# Altium PCB Mikrolysreklamen15.PcbDoc
Units mm, origin at the board's own origin, x right, y up, seen from the top; angles counter-clockwise.
Board outline 173.33 x 36.67 mm, 4 copper layers (Top Layer, Internal Plane 1, Internal Plane 2, Bottom Layer), stack 0.971 mm thick; 90 components, 167 nets, 558 pads, 0 vias.
Unrouted connection lines stored in the file: 314.
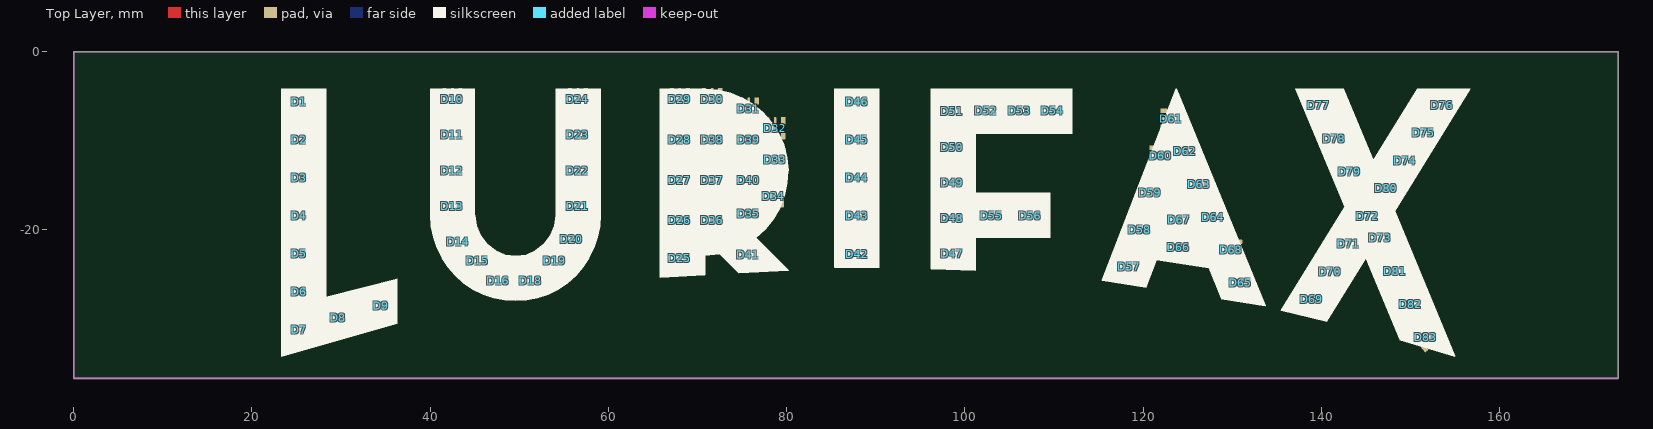
[diagram p0: Top Layer view]
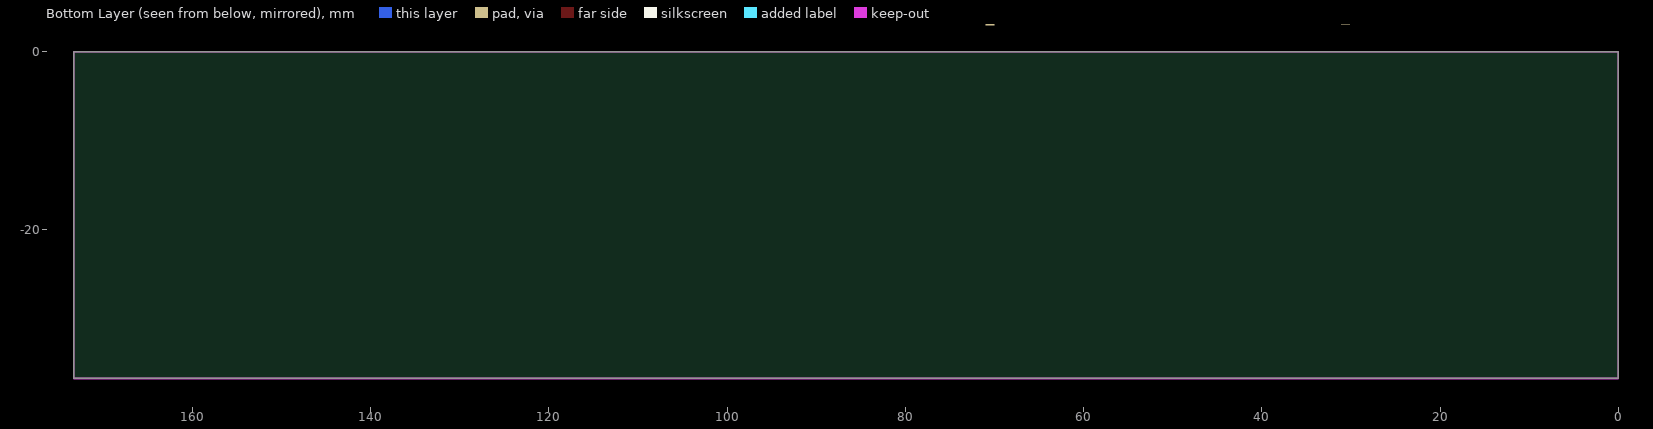
[diagram p1: Bottom Layer view, seen from below]
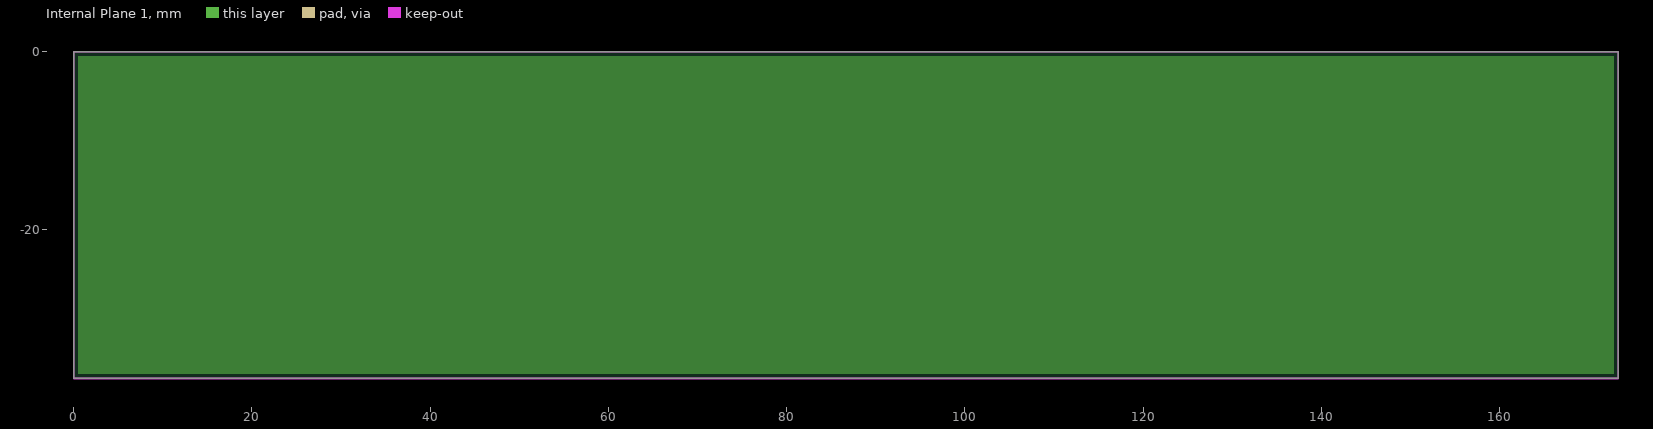
[diagram p2: Internal Plane 1, clearances drawn from the general rule]
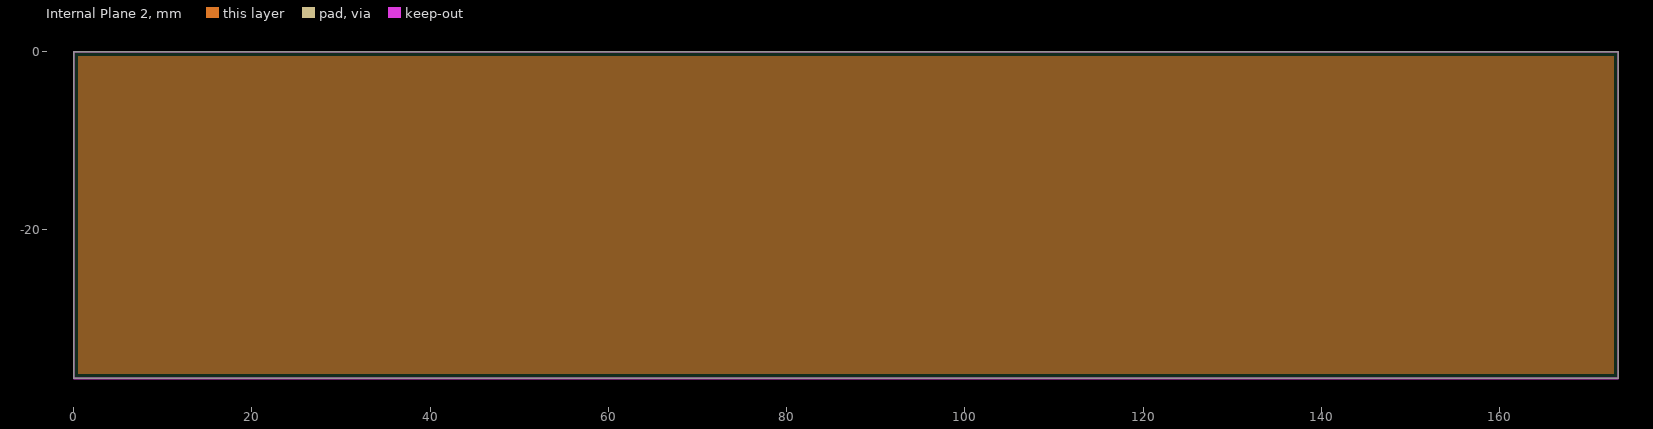
[diagram p3: Internal Plane 2, clearances drawn from the general rule]

## Layer stack, top to bottom
Top Solder: solder mask 0.0102, Solder Resist, Dk 3.5
Top Layer: signal copper 0.0356
Dielectric 3: dielectric 0.254, Dk 4.2
Internal Plane 1: plane copper 0.036
Dielectric 1: dielectric 0.32, FR-4, Dk 4.8
Internal Plane 2: plane copper 0.036
Dielectric 2: dielectric 0.254, Dk 4.2
Bottom Layer: signal copper 0.0356
Bottom Solder: solder mask 0.0102, Solder Resist, Dk 3.5

## Board outline
-0.001,-36.664 -0.001,0.003 173.332,0.003 173.332,-36.664

## Design rules (kind name [scope] priority, off if disabled: settings)
Clearance [All] p1: gap=0.16 ignorepadtopadclearanceinfootprint=FALSE except(0: Arc-Text Arc-Hole Track-Text Track-Hole SMDPad-Text SMDPad-Hole THPad-Text THPad-Hole Via-Text Via-Hole Fill-Text Fill-Hole Poly-Text Poly-Hole Region-Text Region-Hole Text-Text Text-Hole)
DiffPairsRouting [All] p1: maxlimit=0.254 minlimit=0.254 mostfreqgap=0.254 substack1={9E7FAFDF-2B63-4549-80CD-55CEDA884390} toplayer_{9e7fafdf-2b63-4549-80cd-55ceda884390}_minwidth=0.381 toplayer_{9e7fafdf-2b63-4549-80cd-55ceda884390}_maxwidth=0.381 toplayer_{9e7fafdf-2b63-4549-80cd-55ceda884390}_prefwidth=0.381 bottomlayer_{9e7fafdf-2b63-4549-80cd-55ceda884390}_minwidth=0.381 bottomlayer_{9e7fafdf-2b63-4549-80cd-55ceda884390}_maxwidth=0.381 bottomlayer_{9e7fafdf-2b63-4549-80cd-55ceda884390}_prefwidth=0.381 toplayer_minwidth=0.381 toplayer_maxwidth=0.381 toplayer_prefwidth=0.381 bottomlayer_minwidth=0.381 bottomlayer_maxwidth=0.381 bottomlayer_prefwidth=0.381 maxuncoupledlength=12.7
Height [All] p1: minheight=0 maxheight=200 prefheight=12.7
HoleSize [All] p1: absolutevalues=TRUE maxlimit=6.35 minlimit=0.3 maxpercent=80.000 minpercent=20.000
MinimumSolderMaskSliver [All] p1: minsoldermaskwidth=0.1
PlaneClearance [All] p1: clearance=1
PlaneConnect [All] p1: planeconnectstyle=Relief reliefexpansion=0.508 reliefentries=4 reliefconductorwidth=1 reliefairgap=0.254
PolygonConnect [All] p1: connectstyle=Direct reliefconductorwidth=0.254 reliefentries=4 polygonreliefangle="90 Angle" airgapwidth=0.254
RoutingVias [All] p1: holewidth=0.3 width=0.6 viastyle="Through Hole" minholewidth=0.3 minwidth=0.6 maxholewidth=6.35 maxwidth=10
SilkToSolderMaskClearance [IsPad] p1: minsilkscreentomaskgap=0.178 clearancetoexposedcopper=TRUE
SolderMaskExpansion [All] p1: expansion=0.102 istentingtop=FALSE
Width [All] p1: maxlimit=1 minlimit=0.16 preferedwidth=0.2 substack1={9E7FAFDF-2B63-4549-80CD-55CEDA884390}
23 further rules are at their usual default settings.

## Components (designator, comment, footprint, x,y, rotation, side; value= is the part's Value field where it differs from the comment)
C1 "100nF(0603)" CAPC0603(1608)55_N 98.9,6.8 r270 bottom
C2 "100nF(0603)" CAPC0603(1608)55_N 84.2,4.4 r270 bottom
C3 "100nF(0603)" CAPC0603(1608)55_N 70.5,4.2 r270 bottom
C4 "100nF(0603)" CAPC0603(1608)55_N 30.6,4.3 r270 bottom
C5 "100nF(0603)" CAPC0603(1608)55_N 20.5,5.5 r270 bottom
C6 "100nF(0603)" CAPC0603(1608)55_N 4.3,5.7 r270 bottom
D1 "APA102 2020" PCBComponent_1 25.333,-5.6 r90 top
D2 "APA102 2020" PCBComponent_1 25.333,-9.867 r90 top
D3 "APA102 2020" PCBComponent_1 25.333,-14.133 r90 top
D4 "APA102 2020" PCBComponent_1 25.333,-18.4 r90 top
D5 "APA102 2020" PCBComponent_1 25.333,-22.667 r90 top
D6 "APA102 2020" PCBComponent_1 25.333,-26.933 r90 top
D7 "APA102 2020" PCBComponent_1 25.333,-31.2 r90 top
D8 "APA102 2020" PCBComponent_1 29.667,-29.85 r180 top
D9 "APA102 2020" PCBComponent_1 34.5,-28.525 r180 top
D10 "APA102 2020" PCBComponent_1 42.5,-5.333 r90 top
D11 "APA102 2020" PCBComponent_1 42.5,-9.333 r90 top
D12 "APA102 2020" PCBComponent_1 42.5,-13.333 r90 top
D13 "APA102 2020" PCBComponent_1 42.5,-17.333 r90 top
D14 "APA102 2020" PCBComponent_1 43.167,-21.333 r90 top
D15 "APA102 2020" PCBComponent_1 45.333,-23.467 r180 top
D16 "APA102 2020" PCBComponent_1 47.625,-25.675 r180 top
D18 "APA102 2020" PCBComponent_1 51.292,-25.675 r180 top
D19 "APA102 2020" PCBComponent_1 54,-23.475 r270 top
D20 "APA102 2020" PCBComponent_1 55.917,-21.067 r270 top
D21 "APA102 2020" PCBComponent_1 56.583,-17.333 r270 top
D22 "APA102 2020" PCBComponent_1 56.583,-13.333 r270 top
D23 "APA102 2020" PCBComponent_1 56.583,-9.333 r270 top
D24 "APA102 2020" PCBComponent_1 56.583,-5.333 r270 top
D25 "APA102 2020" PCBComponent_1 68,-23.2 r270 top
D26 "APA102 2020" PCBComponent_1 68,-18.933 r270 top
D27 "APA102 2020" PCBComponent_1 68,-14.4 r270 top
D28 "APA102 2020" PCBComponent_1 68,-9.867 r270 top
D29 "APA102 2020" PCBComponent_1 68,-5.333 r90 top
D30 "APA102 2020" PCBComponent_1 71.667,-5.333 r270 top
D31 "APA102 2020" PCBComponent_1 75.75,-6.375 r270 top
D32 "APA102 2020" PCBComponent_1 78.725,-8.6 r270 top
D33 "APA102 2020" PCBComponent_1 78.7,-12.125 r270 top
D34 "APA102 2020" PCBComponent_1 78.575,-16.225 r270 top
D35 "APA102 2020" PCBComponent_1 75.75,-18.175 r270 top
D36 "APA102 2020" PCBComponent_1 71.667,-18.933 r270 top
D37 "APA102 2020" PCBComponent_1 71.667,-14.4 r270 top
D38 "APA102 2020" PCBComponent_1 71.667,-9.867 r270 top
D39 "APA102 2020" PCBComponent_1 75.75,-9.867 r270 top
D40 "APA102 2020" PCBComponent_1 75.75,-14.4 r270 top
D41 "APA102 2020" PCBComponent_1 75.675,-22.8 r270 top
D42 "APA102 2020" PCBComponent_1 87.9,-22.7 r270 top
D43 "APA102 2020" PCBComponent_1 87.9,-18.433 r270 top
D44 "APA102 2020" PCBComponent_1 87.9,-14.167 r270 top
D45 "APA102 2020" PCBComponent_1 87.9,-9.9 r270 top
D46 "APA102 2020" PCBComponent_1 87.9,-5.633 r270 top
D47 "APA102 2020" PCBComponent_1 98.6,-22.675 r270 top
D48 "APA102 2020" PCBComponent_1 98.6,-18.681 r270 top
D49 "APA102 2020" PCBComponent_1 98.6,-14.688 r270 top
D50 "APA102 2020" PCBComponent_1 98.6,-10.694 r270 top
D51 "APA102 2020" PCBComponent_1 98.6,-6.7 r270 top
D52 "APA102 2020" PCBComponent_1 102.425,-6.6 r180 top
D53 "APA102 2020" PCBComponent_1 106.15,-6.6 r180 top
D54 "APA102 2020" PCBComponent_1 109.875,-6.6 r180 top
D55 "APA102 2020" PCBComponent_1 103.012,-18.381 r180 top
D56 "APA102 2020" PCBComponent_1 107.325,-18.381 r0 top
D57 "APA102 2020" PCBComponent_1 118.433,-24.108 r0 top
D58 "APA102 2020" PCBComponent_1 119.621,-19.956 r0 top
D59 "APA102 2020" PCBComponent_1 120.808,-15.804 r0 top
D60 "APA102 2020" PCBComponent_1 121.996,-11.652 r0 top
D61 "APA102 2020" PCBComponent_1 123.183,-7.5 r0 top
D62 "APA102 2020" PCBComponent_1 124.742,-11.185 r0 top
D63 "APA102 2020" PCBComponent_1 126.3,-14.87 r0 top
D64 "APA102 2020" PCBComponent_1 127.858,-18.555 r0 top
D65 "APA102 2020" PCBComponent_1 130.975,-25.925 r0 top
D66 "APA102 2020" PCBComponent_1 124.025,-21.925 r0 top
D67 "APA102 2020" PCBComponent_1 124.075,-18.875 r0 top
D68 "APA102 2020" PCBComponent_1 129.9,-22.24 r0 top
D69 "APA102 2020" PCBComponent_1 138.925,-27.775 r228 top
D70 "APA102 2020" PCBComponent_1 141.023,-24.664 r228 top
D71 "APA102 2020" PCBComponent_1 143.11,-21.556 r129 top
D72 "APA102 2020" PCBComponent_1 145.219,-18.441 r228 top
D73 "APA102 2020" PCBComponent_1 146.615,-20.896 r228 top
D74 "APA102 2020" PCBComponent_1 149.415,-12.219 r228 top
D75 "APA102 2020" PCBComponent_1 151.513,-9.107 r228 top
D76 "APA102 2020" PCBComponent_1 153.6,-6 r129 top
D77 "APA102 2020" PCBComponent_1 139.742,-6.033 r129 top
D78 "APA102 2020" PCBComponent_1 141.457,-9.75 r129 top
D79 "APA102 2020" PCBComponent_1 143.173,-13.467 r129 top
D80 "APA102 2020" PCBComponent_1 147.306,-15.334 r129 top
D81 "APA102 2020" PCBComponent_1 148.319,-24.617 r129 top
D82 "APA102 2020" PCBComponent_1 150.035,-28.333 r129 top
D83 "APA102 2020" PCBComponent_1 151.75,-32.05 r129 top
J1 "Header SMD 127 2x5" SMDHDRV10P127_2X5_615X330X560B 52,15 r180 bottom
U1 "AVR ATXMEGA64A4U-AU" TQFP80P1200X1200X120-44N 68.1,29.1 r180 bottom

## Footprints (in the part's own frame and the unit in brackets; to place one, negate y for a bottom-side part, rotate by r counter-clockwise, add the part's x,y. Pads: shape width x height; smd on the part's side, far side on the other; paste and mask are expansions set on the pad)
CAPC0603(1608)55_N [mm] "Chip Capacitor, Body 1.6x0.8mm, Height 0.55mm, IPC Medium Density"
  rect 0.9x1 smd: 1(-0.8,0) 2(0.8,0)
  silkscreen extent -0.05,-0.4 0.05,0.4, body extent -0.87,-0.48 0.88,0.47, height 0.55
PCBComponent_1 [mm]
  rect 0.8x0.5 smd: 1(-0.85,0.9)
  rrect50% 0.8x0.3 smd: 2(-0.85,0) 5(0.85,0)
  rrect50% 0.8x0.5 smd: 3(-0.85,-0.9) 4(0.85,-0.9) 6(0.85,0.9)
  body extent -1,-1 1,1, height 0.9
SMDHDRV10P127_2X5_615X330X560B [mm] "SMD 2X5 Vertical Header"
  rect 2.4x0.76 smd: 1(-1.95,2.54)
  rrect50% 2.4x0.76 smd: 2(1.95,2.54) 3(-1.95,1.27) 4(1.95,1.27) 5(-1.95,0) 6(1.95,0) 7(-1.95,-1.27) 8(1.95,-1.27) 9(-1.95,-2.54) 10(1.95,-2.54)
  silkscreen extent -4.54,-4.21 1.95,4.29
TQFP80P1200X1200X120-44N [mm] "TQFP, 44-Leads, Body 10,00x10,00mm, Pitch 0,80mm, IPC Medium Density"
  oval 1.75x0.55 smd: 1(-5.875,4) 2(-5.875,3.2) 3(-5.875,2.4) 4(-5.875,1.6) 5(-5.875,0.8) 6(-5.875,0) 7(-5.875,-0.8) 8(-5.875,-1.6) 9(-5.875,-2.4) 10(-5.875,-3.2) 11(-5.875,-4) 23(5.875,-4) 24(5.875,-3.2) 25(5.875,-2.4) 26(5.875,-1.6) 27(5.875,-0.8) 28(5.875,0) 29(5.875,0.8) 30(5.875,1.6) 31(5.875,2.4) 32(5.875,3.2) 33(5.875,4)
  oval 0.55x1.75 smd: 12(-4,-5.875) 13(-3.2,-5.875) 14(-2.4,-5.875) 15(-1.6,-5.875) 16(-0.8,-5.875) 17(0,-5.875) 18(0.8,-5.875) 19(1.6,-5.875) 20(2.4,-5.875) 21(3.2,-5.875) 22(4,-5.875) 34(4,5.875) 35(3.2,5.875) 36(2.4,5.875) 37(1.6,5.875) 38(0.8,5.875) 39(0,5.875) 40(-0.8,5.875) 41(-1.6,5.875) 42(-2.4,5.875) 43(-3.2,5.875) 44(-4,5.875)
  silkscreen extent -6,-4.6 4.6,4.95, body extent -6.03,-5.97 5.97,6.03, height 1.1

## Part data
C1 C2 C3 C4 C5 C6: library part 3028, "100nF 0603 5% X7R 50V", id=3028, leverandor=Farnell, leverandor_varenr=1759122, navn=100nF(0603), nokkelord="Kondensator, Capacitor, CAP", pakke_opprettet="18.02.2015 14:18:13", pakke_opprettet_av=815, pakketype=93, pris=1, produsent=Multikomp, symbol_opprettet="14.11.2014 20:19:34", symbol_opprettet_av=815
D1 D2 D3 D4 D5 D6 D7 D8 D9 D10 D11 D12 D13 D14 D15 D16 D18 D19 D20 D21 D22 D23 D24 D25 D26 D27 D28 D29 D30 D31 D32 D33 D34 D35 D36 D37 D38 D39 D40 D41 D42 D43 D44 D45 D46 D47 D48 D49 D50 D51 D52 D53 D54 D55 D56 D57 D58 D59 D60 D61 D62 D63 D64 D65 D66 D67 D68 D69 D70 D71 D72 D73 D74 D75 D76 D77 D78 D79 D80 D81 D82 D83: library part APA102_2020, AdaFruit=3341, DigiKey=1528-2392-ND
J1: library part 2449, "1,27mm Pitch SMD Header", id=2449, navn="Header SMD 127 2x5", nokkelord=JTAG, pakke_opprettet="15.11.2014 18:30:38", pakke_opprettet_av=815, pakketype=101, pris=20, symbol_opprettet="15.11.2014 18:33:29", symbol_opprettet_av=815
U1: library part 2103, "Mikrokontroller", antall=75, dybde=0, hylle=0, id=2103, kolonne=2, lager_type=Fremlager, navn="AVR ATXMEGA64A4U-AU", pakke_opprettet="22.08.2014 14:00:28", pakke_opprettet_av=774, pakketype=45, pris=0, produsent=Atmel, rad=4, rom=OV, symbol_opprettet="22.08.2014 14:00:55", symbol_opprettet_av=774

## Nets (pads, with @x,y where several pads share a name; then routed paths per layer and width w, separated by ;. In a path a pad name is that pad's centre, name@x,y a point inside that pad or via, vN(x,y) a via of type N, cw(c..) or ccw(c..) an arc to the next point about the centre after c; other vN are vias at no path point)
GND: D2.6 D3.6 D4.6 D5.6 D6.6 D8.6 D9.6 D10.6 D12.6 D13.6 D14.6 D15.6 D16.6 D18.6 D19.6 D20.6 D22.6 D23.6 D24.6 D25.6 D26.6 D27.6 D28.6 D29.6 D30.6 D32.6 D33.6 D34.6 D35.6 D36.6 D37.6 D38.6 D39.6 D40.6 D42.6 D43.6 D44.6 D45.6 D46.6 D47.6 D48.6 D49.6 D50.6 D52.6 D53.6 D54.6 D55.6 D56.6 D57.6 D58.6 D59.6 D60.6 D62.6 D63.6 D64.6 D65.6 D66.6 D67.6 D68.6 D69.6 D70.6 D72.6 D73.6 D74.6 D75.6 D76.6 D77.6 D78.6 D79.6 D80.6 D82.6 D83.6
NetD1_2: D1.2 D2.5
NetD1_3: D1.3 D2.4
NetD1_4: D1.4 U1.25
NetD1_5: D1.5 U1.27
NetD2_2: D2.2 D3.5
NetD2_3: D2.3 D3.4
NetD3_2: D3.2 D4.5
NetD3_3: D3.3 D4.4
NetD4_2: D4.2 D5.5
NetD4_3: D4.3 D5.4
NetD5_2: D5.2 D6.5
NetD5_3: D5.3 D6.4
NetD6_2: D6.2 D7.5
NetD6_3: D6.3 D7.4
NetD7_2: D7.2 D8.5
NetD7_3: D7.3 D8.4
NetD8_2: D8.2 D9.5
NetD8_3: D8.3 D9.4
NetD9_2: D9.2 D10.5
NetD9_3: D9.3 D10.4
NetD10_2: D10.2 D11.5
NetD10_3: D10.3 D11.4
NetD11_2: D11.2 D12.5
NetD11_3: D11.3 D12.4
NetD12_2: D12.2 D13.5
NetD12_3: D12.3 D13.4
NetD13_2: D13.2 D14.5
NetD13_3: D13.3 D14.4
NetD14_2: D14.2 D15.5
NetD14_3: D14.3 D15.4
NetD15_2: D15.2 D16.5
NetD15_3: D15.3 D16.4
NetD16_2: D16.2 D18.5
NetD16_3: D16.3 D18.4
NetD18_2: D18.2 D19.5
NetD18_3: D18.3 D19.4
NetD19_2: D19.2 D20.5
NetD19_3: D19.3 D20.4
NetD20_2: D20.2 D21.5
NetD20_3: D20.3 D21.4
NetD21_2: D21.2 D22.5
NetD21_3: D21.3 D22.4
NetD22_2: D22.2 D23.5
NetD22_3: D22.3 D23.4
NetD23_2: D23.2 D24.5
NetD23_3: D23.3 D24.4
NetD24_2: D24.2 D25.5
NetD24_3: D24.3 D25.4
NetD25_2: D25.2 D26.5
NetD25_3: D25.3 D26.4
NetD26_2: D26.2 D27.5
NetD26_3: D26.3 D27.4
NetD27_1: D27.1 D37.1 D47.1 D57.1 D67.1 D77.1
NetD27_2: D27.2 D28.5
NetD27_3: D27.3 D28.4
NetD28_2: D28.2 D29.5
NetD28_3: D28.3 D29.4
NetD29_2: D29.2 D30.5
NetD29_3: D29.3 D30.4
NetD30_2: D30.2 D31.5
NetD30_3: D30.3 D31.4
NetD31_2: D31.2 D32.5
NetD31_3: D31.3 D32.4
NetD32_2: D32.2 D33.5
NetD32_3: D32.3 D33.4
NetD33_2: D33.2 D34.5
NetD33_3: D33.3 D34.4
NetD34_2: D34.2 D35.5
NetD34_3: D34.3 D35.4
NetD35_2: D35.2 D36.5
NetD35_3: D35.3 D36.4
NetD36_2: D36.2 D37.5
NetD36_3: D36.3 D37.4
NetD37_2: D37.2 D38.5
NetD37_3: D37.3 D38.4
NetD38_2: D38.2 D39.5
NetD38_3: D38.3 D39.4
NetD39_2: D39.2 D40.5
NetD39_3: D39.3 D40.4
NetD40_2: D40.2 D41.5
NetD40_3: D40.3 D41.4
NetD41_2: D41.2 D42.5
NetD41_3: D41.3 D42.4
NetD42_2: D42.2 D43.5
NetD42_3: D42.3 D43.4
NetD43_2: D43.2 D44.5
NetD43_3: D43.3 D44.4
NetD44_2: D44.2 D45.5
NetD44_3: D44.3 D45.4
NetD45_2: D45.2 D46.5
NetD45_3: D45.3 D46.4
NetD46_2: D46.2 D47.5
NetD46_3: D46.3 D47.4
NetD47_2: D47.2 D48.5
NetD47_3: D47.3 D48.4
NetD48_2: D48.2 D49.5
NetD48_3: D48.3 D49.4
NetD49_2: D49.2 D50.5
NetD49_3: D49.3 D50.4
NetD50_2: D50.2 D51.5
NetD50_3: D50.3 D51.4
NetD51_2: D51.2 D52.5
NetD51_3: D51.3 D52.4
NetD52_2: D52.2 D53.5
NetD52_3: D52.3 D53.4
NetD53_2: D53.2 D54.5
NetD53_3: D53.3 D54.4
NetD54_2: D54.2 D55.5
NetD54_3: D54.3 D55.4
NetD55_2: D55.2 D56.5
NetD55_3: D55.3 D56.4
NetD56_2: D56.2 D57.5
NetD56_3: D56.3 D57.4
NetD57_2: D57.2 D58.5
NetD57_3: D57.3 D58.4
NetD58_2: D58.2 D59.5
NetD58_3: D58.3 D59.4
NetD59_2: D59.2 D60.5
NetD59_3: D59.3 D60.4
NetD60_2: D60.2 D61.5
NetD60_3: D60.3 D61.4
NetD61_2: D61.2 D62.5
NetD61_3: D61.3 D62.4
NetD62_2: D62.2 D63.5
NetD62_3: D62.3 D63.4
NetD63_2: D63.2 D64.5
NetD63_3: D63.3 D64.4
NetD64_2: D64.2 D65.5
NetD64_3: D64.3 D65.4
NetD65_2: D65.2 D66.5
NetD65_3: D65.3 D66.4
NetD66_2: D66.2 D67.5
NetD66_3: D66.3 D67.4
NetD67_2: D67.2 D68.5
NetD67_3: D67.3 D68.4
NetD68_2: D68.2 D69.5
NetD68_3: D68.3 D69.4
NetD69_2: D69.2 D70.5
NetD69_3: D69.3 D70.4
NetD70_2: D70.2 D71.5
NetD70_3: D70.3 D71.4
NetD71_2: D71.2 D72.5
NetD71_3: D71.3 D72.4
NetD72_2: D72.2 D73.5
NetD72_3: D72.3 D73.4
NetD73_2: D73.2 D74.5
NetD73_3: D73.3 D74.4
NetD74_2: D74.2 D75.5
NetD74_3: D74.3 D75.4
NetD75_2: D75.2 D76.5
NetD75_3: D75.3 D76.4
NetD76_2: D76.2 D77.5
NetD76_3: D76.3 D77.4
NetD77_2: D77.2 D78.5
NetD77_3: D77.3 D78.4
NetD78_2: D78.2 D79.5
NetD78_3: D78.3 D79.4
NetD79_2: D79.2 D80.5
NetD79_3: D79.3 D80.4
NetD80_2: D80.2 D81.5
NetD80_3: D80.3 D81.4
NetD81_2: D81.2 D82.5
NetD81_3: D81.3 D82.4
NetD82_2: D82.2 D83.5
NetD82_3: D82.3 D83.4
VCC_P5V0: D1.1 D2.1 D3.1 D4.1 D5.1 D6.1 D7.1 D8.1 D9.1 D10.1 D11.1 D12.1 D13.1 D14.1 D15.1 D16.1 D18.1 D19.1 D20.1 D21.1 D22.1 D23.1 D24.1 D25.1 D26.1 D28.1 D29.1 D30.1 D31.1 D32.1 D33.1 D34.1 D35.1 D36.1 D38.1 D39.1 D40.1 D41.1 D42.1 D43.1 D44.1 D45.1 D46.1 D48.1 D49.1 D50.1 D51.1 D52.1 D53.1 D54.1 D55.1 D56.1 D58.1 D59.1 D60.1 D61.1 D62.1 D63.1 D64.1 D65.1 D66.1 D68.1 D69.1 D70.1 D71.1 D72.1 D73.1 D74.1 D75.1 D76.1 D78.1 D79.1 D80.1 D81.1 D82.1 D83.1
pads on no net: C1.1 C1.2 C2.1 C2.2 C3.1 C3.2 C4.1 C4.2 C5.1 C5.2 C6.1 C6.2 D1.6 D7.6 D11.6 D21.6 D31.6 D41.6 D51.6 D61.6 D71.6 D81.6 D83.2 D83.3 J1.1 J1.2 J1.3 J1.4 J1.5 J1.6 J1.7 J1.8 J1.9 J1.10 U1.1 U1.2 U1.3 U1.4 U1.5 U1.6 U1.7 U1.8 U1.9 U1.10 U1.11 U1.12 U1.13 U1.14 U1.15 U1.16 U1.17 U1.18 U1.19 U1.20 U1.21 U1.22 U1.23 U1.24 U1.26 U1.28 U1.29 U1.30 U1.31 U1.32 U1.33 U1.34 U1.35 U1.36 U1.37 U1.38 U1.39 U1.40 U1.41 U1.42 U1.43 U1.44

## Polygon pours and split planes (outlines as drawn)
no net on Top Overlay "NONET_L-01_P-001" (solid): 135.509,-29.032 140.62,-30.268 144.994,-23.164 148.817,-32.331 154.999,-34.164 148.223,-17.919 156.691,-4.164 150.819,-4.164 145.852,-12.233 142.486,-4.164 137.069,-4.164 142.622,-17.479
no net on Top Overlay "NONET_L-01_P-001" (solid): 120.34,-26.428 121.545,-23.32 127.346,-24.216 128.791,-27.734 133.732,-28.498 123.735,-4.164 115.399,-25.664
no net on Top Overlay "NONET_L-01_P-001" (solid): 101.232,-24.498 101.232,-20.831 109.566,-20.831 109.566,-15.831 101.235,-15.831 101.235,-9.164 112.068,-9.164 112.068,-4.164 96.235,-4.164 96.235,-24.331
no net on Top Overlay "NONET_L-01_P-001" (solid): 85.402,-24.164 85.402,-4.164 90.402,-4.164 90.402,-24.164
no net on Top Overlay "NONET_L-01_P-001" (solid): 65.832,-25.331 70.832,-25.04 70.832,-22.831 72.498,-22.681 74.618,-24.82 80.165,-24.498 76.564,-20.864 77.653,-19.868 78.557,-18.736 79.267,-17.492 79.777,-16.161 80.079,-14.768 80.165,-13.338 80.028,-11.896 79.66,-10.468 79.072,-9.114 78.295,-7.892 77.349,-6.816 76.256,-5.902 75.036,-5.164 73.711,-4.619 72.303,-4.28 70.832,-4.164 65.832,-4.164
no net on Top Overlay "NONET_L-01_P-001" (solid): 42.79,-25.093 43.733,-25.923 44.79,-26.63 45.932,-27.192 47.121,-27.593 48.344,-27.834 49.582,-27.914 50.82,-27.834 52.042,-27.593 53.232,-27.192 54.373,-26.63 55.431,-25.923 56.373,-25.093 57.193,-24.155 57.881,-23.123 58.431,-22.01 58.833,-20.831 59.081,-19.6 59.165,-18.331 59.165,-4.164 54.165,-4.164 54.165,-18.331 54.006,-19.527 53.551,-20.623 52.829,-21.565 51.873,-22.3 50.758,-22.761 49.581,-22.914 48.405,-22.761 47.29,-22.3 46.333,-21.565 45.612,-20.623 45.157,-19.527 44.998,-18.331 44.998,-4.164 39.998,-4.164 39.998,-18.331 40.083,-19.6 40.33,-20.831 40.733,-22.01 41.282,-23.123 41.971,-24.155
no net on Top Overlay "NONET_L-01_P-001" (solid): 23.332,-34.164 23.332,-4.164 28.332,-4.164 28.332,-27.498 36.332,-25.498 36.332,-30.498
no net on Internal Plane 1 (split plane): 172.822,-36.154 0.509,-36.154 0.509,-0.508 172.822,-0.508
no net on Internal Plane 2 (split plane): 172.822,-36.154 0.509,-36.154 0.509,-0.508 172.822,-0.508

## Keep-outs
Keep-Out Layer:
  the board outline again, w0.2

## Silkscreen, mask and mechanical layers (free items; w line width, h text height)
Top Overlay:
  lines w0.013: -99.994,178.243 -98.406,179.831 -99.994,178.243 ; -99.2,177.714 -99.2,180.36 -99.2,177.714 ; -99.2,177.979 -98.142,179.037 -99.2,177.979 ; -98.671,177.45 -97.612,178.508 -98.671,177.45 ; -98.142,176.921 -97.083,177.979 -98.142,176.921 ; 23.332,-34.164 23.332,-4.164 28.332,-4.164 28.332,-27.498 36.332,-25.498 36.332,-30.498 23.332,-34.164 ; 39.998,-18.331 39.998,-4.164 44.998,-4.164 44.998,-18.331 45.157,-19.527 45.612,-20.623 46.333,-21.565 47.29,-22.3 48.405,-22.761 49.581,-22.914 50.758,-22.761 51.873,-22.3 52.829,-21.565 53.551,-20.623 54.006,-19.527 54.165,-18.331 54.165,-4.164 59.165,-4.164 59.165,-18.331 59.081,-19.6 58.833,-20.831 58.431,-22.01 57.881,-23.123 57.193,-24.155 56.373,-25.093 55.431,-25.923 54.373,-26.63 53.232,-27.192 52.042,-27.593 50.82,-27.834 49.582,-27.914 48.344,-27.834 47.121,-27.593 45.932,-27.192 44.79,-26.63 43.733,-25.923 42.79,-25.093 41.971,-24.155 41.282,-23.123 40.733,-22.01 40.33,-20.831 40.083,-19.6 39.998,-18.331 ; 65.832,-25.331 65.832,-4.164 70.832,-4.164 72.303,-4.28 73.711,-4.619 75.036,-5.164 76.256,-5.902 77.349,-6.816 78.295,-7.892 79.072,-9.114 79.66,-10.468 80.028,-11.896 80.165,-13.338 80.079,-14.768 79.777,-16.161 79.267,-17.492 78.557,-18.736 77.653,-19.868 76.564,-20.864 80.165,-24.498 74.618,-24.82 72.498,-22.681 70.832,-22.831 70.832,-25.04 65.832,-25.331 ; 85.402,-24.164 90.402,-24.164 90.402,-4.164 85.402,-4.164 85.402,-24.164 ; 96.235,-24.331 101.232,-24.498 101.232,-20.831 109.566,-20.831 109.566,-15.831 101.235,-15.831 101.235,-9.164 112.068,-9.164 112.068,-4.164 96.235,-4.164 96.235,-24.331 ; 115.399,-25.664 120.34,-26.428 121.545,-23.32 127.346,-24.216 128.791,-27.734 133.732,-28.498 123.735,-4.164 115.399,-25.664 ; 135.509,-29.032 140.62,-30.268 144.994,-23.164 148.817,-32.331 154.999,-34.164 148.223,-17.919 156.691,-4.164 150.819,-4.164 145.852,-12.233 142.486,-4.164 137.069,-4.164 142.622,-17.479 135.509,-29.032